# Altium PCB PCB1.pcbdoc (part 2 of 4)
Units mil, origin at the board's own origin, x right, y up, seen from the top; angles counter-clockwise.
Board outline 3346.69 x 4227.01 mil, 4 copper layers (Top Layer, Inner1, Inner2, Bottom Layer); 103 components, 145 nets, 660 pads, 276 vias.
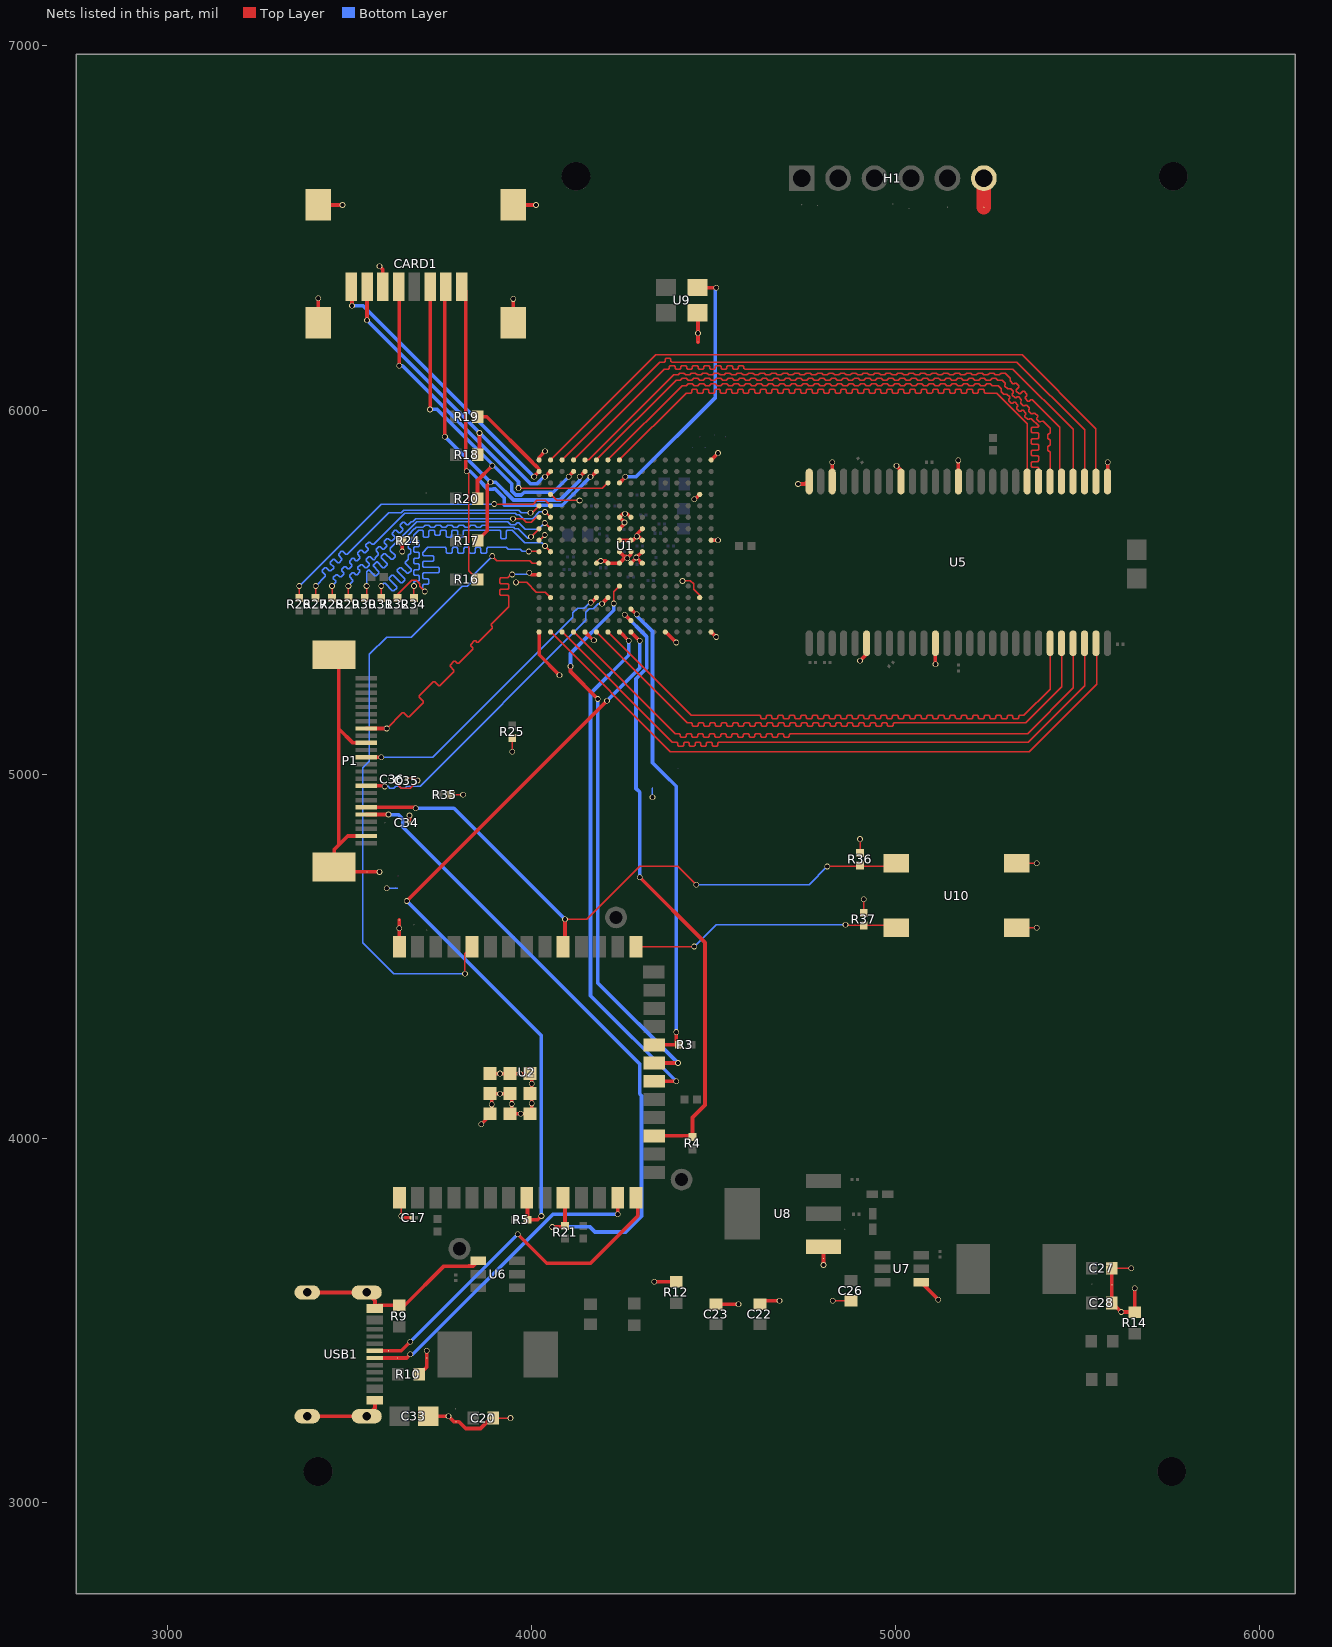
[diagram p4: the nets of this part, all layers, seen from the top]

## Via types
v1: diameter 15.75, hole 11.81, Top Layer to Bottom Layer, 260 vias
v2: diameter 24.02, hole 12.01, Top Layer to Bottom Layer, 16 vias

## Nets (pads, with @x,y where several pads share a name; then routed paths per layer and width w, separated by ;. In a path a pad name is that pad's centre, name@x,y a point inside that pad or via, vN(x,y) a via of type N, cw(c..) or ccw(c..) an arc to the next point about the centre after c; other vN are vias at no path point) (continued)
CRYSTAL: U1.C8 U9.3 | length 715.6
  Top Layer w10: U1.C8@4241.26,5800.24 4257.01,5815.99 v1(4257.01,5817.01) ; U9.3@4455.32,6336.46 v1(4507.01,6336.46)
  Bottom Layer w10: v1(4257.01,5817.01) 4287.01,5817.01 4504.92,6034.92 4504.92,6334.37 v1(4507.01,6336.46)
D0: R26.1 U1.E2 | length 827.3
  Top Layer w3.94: R26.1@3362.01,5484.05 v1(3362.01,5517.01) ; v1@3897.01,5742.01 4004.28,5742.01 4014.56,5752.29 4037.25,5752.29 U1.E2@4052.29,5737.25
  Bottom Layer w3.94: v1(3362.01,5517.01) 3587.01,5742.01 v1(3897.39,5742.01)
D1: R27.1 U1.E1 | length 830.3
  Top Layer w3.94: R27.1@3407.01,5484.05 v1(3407.01,5517.01) ; v1(3997.01,5718.15) 4001.69,5718.15 U1.E1@4020.79,5737.25
  Bottom Layer w3.94: v1(3407.01,5517.01) 3433.98,5543.98 3433.98,5547.91 3425.41,5556.48 3425.41,5560.41 3432.61,5567.61 3436.55,5567.61 3445.11,5559.05 3449.05,5559.05 3456.25,5566.25 3456.25,5570.19 3447.69,5578.75 3447.69,5582.69 3454.88,5589.88 3458.82,5589.88 3467.38,5581.32 3471.32,5581.32 3478.52,5588.52 3478.52,5592.46 3469.96,5601.02 3469.96,5604.96 3477.15,5612.15 3481.09,5612.15 3489.65,5603.59 3493.59,5603.59 3608.15,5718.15 3642.01,5718.15 3649.02,5725.16 3965.23,5725.16 3972.24,5718.15 v1(3997.01,5718.15)
D2: R28.1 U1.F2 | length 844.7
  Top Layer w3.94: R28.1@3452.01,5484.05 v1(3452.01,5517.01) ; v1(4036.89,5720.31) 4037.73,5720.31 U1.F2@4052.29,5705.75
  Bottom Layer w3.94: v1(3452.01,5517.01) 3462.01,5527.01 3462.01,5530.94 3455.94,5537.01 3455.94,5540.94 3463.14,5548.14 3467.08,5548.14 3473.14,5542.08 3477.08,5542.08 3484.28,5549.28 3484.28,5553.22 3478.22,5559.28 3478.22,5563.22 3485.41,5570.41 3489.35,5570.41 3495.41,5564.35 3499.35,5564.35 3506.55,5571.55 3506.55,5575.49 3500.49,5581.55 3500.49,5585.49 3507.69,5592.69 3511.62,5592.69 3517.69,5586.62 3521.62,5586.62 3528.82,5593.82 3528.82,5597.76 3522.76,5603.82 3522.76,5607.76 3529.96,5614.96 3533.89,5614.96 3539.96,5608.89 3543.89,5608.89 3551.09,5616.09 3551.09,5620.03 3545.03,5626.09 3545.03,5630.03 3552.23,5637.23 3556.16,5637.23 3562.23,5631.16 3566.16,5631.16 3652.28,5717.28 3955.33,5717.28 3959.64,5712.97 3966.28,5712.97 3976.93,5702.32 4003.56,5702.32 4021.55,5720.31 v1(4036.89,5720.31)
D3: R29.1 U1.F1 | length 814.7
  Top Layer w3.94: R29.1@3497.01,5484.05 v1(3497.01,5517.01) ; v1(3948.78,5701.46) 3976.32,5701.46 3985.45,5692.32 3998.56,5692.32 4012.66,5706.42 4020.12,5706.42 U1.F1@4020.79,5705.75
  Bottom Layer w3.94: v1(3497.01,5517.01) 3509.58,5529.58 3509.58,5533.52 3501.02,5542.08 3501.02,5546.02 3508.21,5553.21 3512.15,5553.21 3516.85,5548.52 3520.79,5548.52 3527.98,5555.72 3527.98,5559.65 3523.29,5564.35 3523.29,5568.29 3530.49,5575.49 3534.42,5575.49 3542.99,5566.92 3546.92,5566.92 3554.12,5574.12 3554.12,5578.06 3545.56,5586.62 3545.56,5590.56 3552.76,5597.76 3556.69,5597.76 3565.26,5589.19 3569.19,5589.19 3571.26,5591.26 3571.26,5595.05 3579.61,5603.41 3579.61,5607.34 3572.95,5614.01 3572.95,5617.95 3580.14,5625.14 3584.08,5625.14 3590.75,5618.48 3594.68,5618.48 3601.88,5625.68 3601.88,5629.61 3595.22,5636.28 3595.22,5640.22 3602.42,5647.42 3606.35,5647.42 3613.02,5640.75 3616.96,5640.75 3624.15,5647.95 3624.15,5651.88 3617.49,5658.55 3617.49,5662.49 3624.69,5669.69 3628.62,5669.69 3635.29,5663.02 3639.23,5663.02 3646.42,5670.22 3646.42,5674.16 3639.76,5680.82 3639.76,5684.76 3646.96,5691.96 3650.89,5691.96 3657.56,5685.29 3661.5,5685.29 3669.71,5693.5 3673.5,5693.5 3681.46,5701.46 v1(3948.78,5701.46)
D4: R30.1 U1.G2 | length 836.9
  Top Layer w3.94: R30.1@3542.01,5484.05 3547.01,5489.05 v1(3547.01,5517.01) ; v1(4036.29,5690.13) 4036.41,5690.13 U1.G2@4052.29,5674.25
  Bottom Layer w3.94: v1(3547.01,5517.01) 3547.01,5555.87 3552.76,5561.63 3553.47,5561.63 3569.69,5545.41 3573.63,5545.41 3580.83,5552.61 3580.83,5556.55 3564.61,5572.76 3564.61,5573.48 3575.04,5583.9 3575.75,5583.9 3591.96,5567.68 3595.9,5567.68 3603.1,5574.88 3603.1,5578.82 3586.88,5595.04 3586.88,5598.97 3594.08,5606.17 3598.02,5606.17 3614.23,5589.95 3618.17,5589.95 3625.37,5597.15 3625.37,5601.09 3612.01,5614.45 3612.01,5620.87 3628.77,5637.63 3632.7,5637.63 3641.3,5629.04 3645.23,5629.04 3652.43,5636.24 3652.43,5640.17 3643.84,5648.77 3643.84,5652.7 3684.72,5693.58 3934.27,5693.58 3942.22,5685.63 3955.33,5685.63 3960.33,5690.63 3964.6,5690.63 3982.39,5672.83 4019,5672.83 v1(4036.29,5690.13)
D5: R31.1 U1.G1 | length 826
  Top Layer w3.94: R31.1@3587.01,5484.05 v1(3587.01,5517.01) ; v1(3998.33,5652.01) 3998.55,5652.01 U1.G1@4020.79,5674.25
  Bottom Layer w3.94: v1(3587.01,5517.01) 3594.05,5524.05 3597.98,5524.05 3618.03,5504 3621.96,5504 3629.16,5511.2 3629.16,5515.14 3609.12,5535.18 3609.12,5539.12 3616.32,5546.32 3620.25,5546.32 3640.3,5526.28 3644.23,5526.28 3651.43,5533.47 3651.43,5537.41 3631.39,5557.45 3631.39,5561.39 3637.83,5567.83 3641.77,5567.83 3658,5551.6 3661.94,5551.6 3669.13,5558.8 3669.13,5562.74 3652.9,5578.97 3652.9,5582.9 3660.79,5590.79 3660.79,5600.93 3663.58,5603.72 3665.2,5603.72 3667.98,5606.5 3667.98,5616.68 3665.2,5619.47 3663.58,5619.47 3660.79,5622.25 3660.79,5632.43 3663.58,5635.21 3665.2,5635.21 3667.98,5638 3667.98,5648.18 3665.2,5650.96 3663.58,5650.96 3660.79,5653.75 3660.79,5656.64 3678.36,5674.21 3679.21,5674.21 3682.76,5677.76 3701.87,5677.76 3704.65,5680.54 3704.65,5681.77 3707.43,5684.56 3717.61,5684.56 3720.4,5681.77 3720.4,5680.54 3723.18,5677.76 3733.36,5677.76 3736.15,5680.54 3736.15,5681.77 3738.93,5684.56 3749.11,5684.56 3751.89,5681.77 3751.89,5680.54 3754.68,5677.76 3764.86,5677.76 3767.64,5680.54 3767.64,5681.77 3770.43,5684.56 3780.61,5684.56 3783.39,5681.77 3783.39,5680.54 3786.17,5677.76 3796.36,5677.76 3799.14,5680.54 3799.14,5681.77 3801.92,5684.56 3812.1,5684.56 3814.89,5681.77 3814.89,5680.54 3817.67,5677.76 3827.85,5677.76 3830.63,5680.54 3830.63,5681.77 3833.42,5684.56 3843.6,5684.56 3846.38,5681.77 3846.38,5680.54 3849.17,5677.76 3859.35,5677.76 3862.13,5680.54 3862.13,5681.77 3864.91,5684.56 3875.1,5684.56 3877.88,5681.77 3877.88,5680.54 3880.66,5677.76 3950.92,5677.76 3954.47,5674.21 3963.47,5674.21 3989.22,5648.46 3994.78,5648.46 v1(3998.33,5652.01)
D6: R32.1 U1.J1 | length 823.8
  Top Layer w3.94: R32.1@3632.01,5484.05 3632.01,5494.39 3670.45,5532.83 3683.56,5532.83 3692.83,5523.56 3692.83,5516.18 v1(3707.01,5502.01) ; v1(3992.01,5612.01) 4020.04,5612.01 U1.J1@4020.79,5611.26
  Bottom Layer w3.94: v1(3707.01,5502.01) 3701.18,5507.83 3701.18,5519.02 3703.97,5521.8 3714.37,5521.8 3717.15,5524.58 3717.15,5534.76 3714.37,5537.55 3703.97,5537.55 3701.18,5540.33 3701.18,5550.51 3703.97,5553.3 3744.22,5553.3 3747.01,5556.08 3747.01,5566.26 3744.22,5569.04 3703.97,5569.04 3701.18,5571.83 3701.18,5582.01 3703.97,5584.79 3729.21,5584.79 3732,5587.58 3732,5597.76 3729.21,5600.54 3703.97,5600.54 3701.18,5603.32 3701.18,5608.56 3715.45,5622.83 3763.38,5622.83 3766.17,5620.05 3766.17,5609.79 3768.95,5607.01 3779.13,5607.01 3781.92,5609.79 3781.92,5620.05 3784.7,5622.83 3794.88,5622.83 3797.66,5620.05 3797.66,5609.79 3800.45,5607.01 3810.63,5607.01 3813.41,5609.79 3813.41,5620.05 3816.2,5622.83 3826.38,5622.83 3829.16,5620.05 3829.16,5609.79 3831.94,5607.01 3842.12,5607.01 3844.91,5609.79 3844.91,5620.05 3847.69,5622.83 3857.87,5622.83 3860.66,5620.05 3860.66,5609.79 3863.44,5607.01 3873.62,5607.01 3876.4,5609.79 3876.4,5620.05 3879.19,5622.83 3931.18,5622.83 3936.18,5617.83 3968.56,5617.83 3974.39,5612.01 v1(3992.01,5612.01)
D7: R34.1 U1.J2 | length 826.3
  Top Layer w3.94: R34.1@3677.01,5484.05 v1(3677.01,5517.01) ; v1(4037.01,5627.01) 4037.01,5626.54 U1.J2@4052.29,5611.26
  Bottom Layer w3.94: v1(3677.01,5517.01) 3677.01,5527.8 3679.79,5530.59 3689.37,5530.59 3692.15,5533.37 3692.15,5543.55 3689.37,5546.34 3679.79,5546.34 3677.01,5549.12 3677.01,5559.3 3679.79,5562.08 3689.37,5562.08 3692.15,5564.87 3692.15,5575.05 3689.37,5577.83 3679.79,5577.83 3677.01,5580.62 3677.01,5590.8 3679.79,5593.58 3689.37,5593.58 3692.15,5596.36 3692.15,5606.54 3689.37,5609.33 3679.79,5609.33 3677.01,5612.11 3677.01,5622.29 3679.79,5625.08 3689.37,5625.08 3692.15,5627.86 3692.15,5638.04 3689.37,5640.82 3679.79,5640.82 3677.01,5643.61 3677.01,5657.01 3689.88,5669.88 3699.67,5669.88 3702.45,5667.1 3702.45,5653.78 3705.24,5651 3715.42,5651 3718.2,5653.78 3718.2,5667.1 3720.99,5669.88 3731.17,5669.88 3733.95,5667.1 3733.95,5659.35 3736.73,5656.56 3746.91,5656.56 3749.7,5659.35 3749.7,5667.1 3752.48,5669.88 3762.66,5669.88 3765.45,5667.1 3765.45,5653.78 3768.23,5651 3778.41,5651 3781.19,5653.78 3781.19,5667.1 3783.98,5669.88 3794.16,5669.88 3796.94,5667.1 3796.94,5653.78 3799.73,5651 3809.91,5651 3812.69,5653.78 3812.69,5667.1 3815.47,5669.88 3912.07,5669.88 3914.85,5667.1 3914.85,5649.79 3917.64,5647.01 3927.82,5647.01 3930.6,5649.79 3930.6,5667.1 3933.39,5669.88 3947.66,5669.88 3981.36,5636.18 4027.83,5636.18 v1(4037.01,5627.01)
DIN: U1.T8 U2.20 | length 1441.2
  Top Layer w10: U1.T8@4241.26,5390.79 4243.23,5390.79 v1(4267.01,5367.01) ; U2.20@4342.2,4157.01 v1(4397.01,4157.01)
  Bottom Layer w10: v1(4267.01,5367.01) 4267.01,5327.01 4162.01,5222.01 4162.01,4392.01 v1(4397.01,4157.01)
DN: pad.55@3632.01,3397.01 U2.13 USB1.A7 | length 878
  Top Layer w10: USB1.A7@3570.02,3397.17 3621.05,3397.17 3657.17,3397.17 v1(3667.01,3407.01) ; v1(4237.01,3792.01) 4237.01,3832.71 U2.13@4241.81,3837.52
  Bottom Layer w10: v1(3667.01,3407.01) 3673.68,3407.01 4058.68,3792.01 v1(4237.01,3792.01)
DONE: pad.55@4364.77,4999.24 R3.2 U1.P9 U2.22 | length 1315.4
  Top Layer w10: U1.P9@4272.76,5453.78 4287.33,5439.2 v1(4289.2,5439.2) ; U2.22@4342.2,4257.01 R3.2@4404.97,4257.01 4397.01,4264.97 v1(4397.01,4292.01)
  Bottom Layer w10: v1(4289.2,5439.2) 4289.2,5434.81 4332.01,5392.01 4332.01,5032.01 pad.55@4364.77,4999.24 4397.01,4967.01 v1(4397.01,4292.01)
DOUT: U1.M8 U2.21 | length 1547.4
  Top Layer w3.94: v1(4225.51,5468.95) 4225.51,5501.02 U1.M8@4241.26,5516.77
  Top Layer w10: v1(4107.01,5297.01) 4107.01,5282.01 v1(4182.01,5207.01) ; U2.21@4342.2,4207.01 v1(4402.01,4207.01)
  Bottom Layer w10: v1(4107.01,5297.01) 4107.01,5332.01 4225.51,5450.51 v1(4225.51,5468.95) ; v1(4182.01,5207.01) 4182.01,4427.01 v1(4402.01,4207.01)
DP: pad.55@3607.01,3417.01 U2.14 USB1.A6 | length 992
  Top Layer w10: USB1.A6@3570.02,3416.85 3619.28,3416.85 3641.85,3416.85 v1(3667.01,3442.01) ; v1(3962.01,3737.01) 4042.01,3657.01 4162.01,3657.01 4291.81,3786.81 U2.14@4291.81,3837.52
  Bottom Layer w10: v1(3667.01,3442.01) v1(3962.01,3737.01)
GND: C17.1 C20.1 C22.1 C23.1 C26.1 C27.1 C28.1 C33.1 C34.2 C35.2 C36.2 CARD1.6 CARD1.9 CARD1.10 CARD1.11 CARD1.12 H1.6 P1.2 P1.15 P1.25 P1.26 pad.55@3548.45,4732.01 pad.55@3627.01,4687.01 pad.55@3636.81,4599.69 pad.55@3712.01,3397.01 pad.55@3792.01,3222.01 pad.55@4332.01,4962.01 pad.55@4457.01,6187.01 pad.55@4801.76,3670.62 pad.55@5242.01,6557.01 pad.55@5593.75,3598.16 R9.1 R10.1 R12.1 R14.1 R24.1 R25.1 R35.2 R36.2 R37.2 U1.A1 U1.A16 U1.D2 U1.D15 U1.F8 U1.F9 U1.G8 U1.G10 U1.H1 U1.H8 U1.H9 U1.H10 U1.H16 U1.J8 U1.J9 U1.J10 U1.K6 U1.K7 U1.K8 U1.K9 U1.K10 U1.N2 U1.N15 U1.T1 U1.T5 U1.T12 U1.T16 U2.1 U2.40 U2.41 U5.6 U5.12 U5.28 U5.41 U5.46 U5.52 U5.54 U6.4 U7.4 U8.1 U9.2 U10.2 U10.4 USB1.1 USB1.2 USB1.3 USB1.4 USB1.A1B12 USB1.B1A12 | length 5600.2
  Top Layer w3.94: C36.2@3624.69,4987.01 3624.69,4979.33 3641.77,4962.24 3667.24,4962.24 3687.01,4982.01 v1(3687.01,4982.83) 3680.15,4989.69 C35.2@3657.01,4989.69 ; U2.1@3636.81,3837.52 3641.81,3832.52 v1(3641.81,3787.01) ; R35.2@3778.5,4943.95 v1(3812.01,4943.95) ; C20.1@3894.57,3232.01 v1(3942.01,3232.01) ; v1(3947.01,5062.01) R25.1@3947.01,5099.97 ; v1(3957.01,5527.01) 3987.01,5527.01 4013.46,5500.56 4037.01,5500.56 U1.N2@4052.29,5485.28 ; 4027.01,5647.01 4036.53,5656.53 v1(4036.53,5657.01) ; U1.D2@4052.29,5768.74 4069.02,5752.01 4077.27,5752.01 4077.55,5752.29 4121.51,5752.29 4121.79,5752.01 v1@4132.01,5752.01 ; v1(4414.49,5530.64) 4419.96,5530.64 4421.13,5531.81 4436.47,5531.81 4445.28,5523 4445.28,5507.66 4461.73,5491.21 U1.N15@4461.73,5485.28 ; v1(4827.01,3554.45) C26.1@4877.01,3554.45 ; R36.2@4902.01,4784.05 v1(4902.01,4822.01) ; R37.2@4912.01,4619.05 v1(4912.01,4657.01) ; U10.4@5332.36,4578.42 v1(5387.01,4578.42) ; U10.2@5332.36,4755.59 v1(5387.01,4755.59) ; C27.1@5593.75,3643.55 v1(5647.01,3643.55)
  Top Layer w10: USB1.4@3384,3236.93 USB1.2@3547.38,3236.93 3570.02,3259.57 USB1.B1A12@3570.02,3281.03 ; USB1.3@3384,3577.09 USB1.1@3547.38,3577.09 3570.02,3554.45 USB1.A1B12@3570.02,3533 3578.69,3541.67 R9.1@3637.01,3541.67 3652.01,3541.67 3759.75,3649.41 3827.26,3649.41 3827.65,3649.8 3839.25,3649.8 U6.4@3853.86,3664.41 ; CARD1.10@3414.29,6240.59 v1(3414.28,6307.18) ; CARD1.9@3414.29,6563.43 v1(3480.63,6563.43) ; P1.25@3457.45,5328.38 3470.61,5315.23 3470.61,5125.37 ; P1.2@3546.45,4830.49 3495.49,4830.49 3470.61,4805.61 ; P1.15@3546.5,5086.24 3509.73,5086.24 3470.61,5125.37 ; v1(3582.5,6395.22) 3591.45,6386.27 CARD1.6@3591.45,6339.02 ; v1(3582.7,4732.01) pad.55@3548.45,4732.01 3471.32,4732.01 P1.26@3457.7,4745.63 3457.7,4792.7 3470.61,4805.61 ; pad.55@3636.81,4599.69 v1(3636.81,4577.16) 3636.81,4531.5 U2.40@3641.81,4526.5 ; v1(3641.81,3787.01) 3646.81,3782.01 C17.1@3669.33,3782.01 ; v1(3644.97,5611.75) R24.1@3644.97,5642.01 ; C34.2@3664.69,4867.01 v1(3664.69,4887.01) ; R10.1@3691.67,3352.01 3712.01,3372.35 pad.55@3712.01,3397.01 v1(3712.01,3417.01) ; C33.1@3716.38,3237.01 v1(3772.01,3237.01) 3787.01,3222.01 3800.45,3222.01 3819.15,3203.31 3859.75,3203.31 3888.45,3232.01 C20.1@3894.57,3232.01 ; v1(3862.04,4039.24) 3890.63,4067.83 v1(3890.63,4093.53) 3890.63,4122.95 v1(3913.31,4122.95) 3945.75,4122.95 v1(3945.75,4094.52) 3945.75,4067.83 v1(3970.16,4067.83) 4000.87,4067.83 v1(4000.87,4096.24) v1(4000.87,4149.89) 4000.87,4178.07 v1(3967.45,4178.07) v1(3913.31,4178.07) U2.41@3890.63,4178.07 ; CARD1.11@3949.72,6240.59 v1(3949.72,6305.52) ; CARD1.12@3949.72,6563.43 v1(4012.01,6563.43) ; U1.T1@4020.79,5390.79 4020.79,5328.23 v1(4077.01,5272.01) ; U1.A1@4020.79,5863.23 4020.79,5870.79 v1(4037.01,5887.01) ; U1.T5@4146.77,5390.79 4169.71,5367.84 v1(4171.17,5367.84) ; U1.K6@4178.27,5579.77 4184.35,5585.85 v1(4190.02,5585.85) 4203.69,5585.85 U1.K7@4209.77,5579.77 U1.K8@4241.26,5579.77 v1@4259.45,5597.96 ; U1.J8@4241.26,5611.26 4254.56,5597.96 v1@4259.45,5597.96 ; U1.H8@4241.26,5642.76 U1.H9@4272.76,5642.76 4278.68,5642.76 v1(4289.25,5653.32) ; U1.G8@4241.26,5674.25 4255.12,5688.11 v1(4255.12,5691.24) 4255.12,5691.88 U1.F8@4241.26,5705.75 4251.26,5715.75 v1(4256.64,5715.75) 4262.76,5715.75 U1.F9@4272.76,5705.75 ; U1.K9@4272.76,5579.77 4287.66,5594.67 v1(4287.66,5595.2) ; U1.J9@4272.76,5611.26 4272.76,5603.5 v1(4262.54,5593.29) 4262.54,5594.86 v1@4259.45,5597.96 ; U1.K10@4298.12,5580.87 4298.12,5584.74 v1(4287.66,5595.2) ; U1.J10@4304.25,5611.26 4303.73,5611.26 v1(4287.66,5595.2) ; U1.H10@4304.25,5642.76 4293.68,5653.32 v1(4289.25,5653.32) ; U1.G10@4304.25,5674.25 4289.25,5659.25 v1(4289.25,5653.32) ; v1(4337.01,3606.67) R12.1@4397.01,3606.67 ; U1.T12@4367.25,5390.79 4368.23,5390.79 v1(4397.05,5361.97) ; v1@4447.01,5757.01 4450,5757.01 U1.D15@4461.73,5768.74 ; U9.2@4455.32,6267.56 4457.01,6265.87 v1(4457.01,6210.84) pad.55@4457.01,6187.01 ; U1.T16@4493.23,5390.79 v1(4507.01,5377.01) ; U1.H16@4493.23,5642.76 v1(4512.01,5642.83) ; U1.A16@4493.23,5863.23 v1(4512.01,5882.01) ; C23.1@4507.01,3544.57 v1(4568.19,3544.57) ; C22.1@4627.01,3544.57 4636.89,3554.45 v1(4680.98,3554.45) ; v1(4732.01,5797.01) 4750.43,5797.01 U5.54@4762.56,5809.14 ; v1(4801.76,3652.39) pad.55@4801.76,3670.62 U8.1@4801.76,3702.6 ; U5.52@4825.55,5809.14 v1(4825.55,5857.01) ; v1(4902.01,5312.01) 4920.04,5330.04 U5.6@4920.04,5359.88 ; v1(5002.01,5847.01) 5014.53,5834.49 U5.46@5014.53,5804.14 ; U7.4@5070.16,3604.61 5117.01,3557.76 v1(5117.01,3557.01) ; v1(5109.02,5302.01) U5.12@5109.02,5359.88 ; U5.41@5172.01,5809.14 v1(5172.01,5862.01) ; U5.28@5581.46,5804.14 5582.01,5804.69 v1(5582.01,5857.01) ; C27.1@5593.75,3643.55 pad.55@5593.75,3598.16 C28.1@5593.75,3548.55 v1(5619.09,3523.21) R14.1@5656.19,3523.21 v1(5656.19,3588.55) ; 3470.61,4805.61 3470.61,5125.37
  Top Layer w39.37: pad.55@5242.01,6557.01 H1.6@5242.01,6637.01
  Bottom Layer w3.94: v1(3602.01,4687.01) 3632.01,4687.01 ; v1(4332.01,4937.01) pad.55@4332.01,4962.01
  other v1: 4131.96,5752.06 4447.01,5755.14
HREF: P1.9 U1.N7 | length 902.4
  Top Layer w10: P1.9@3546.45,4968.28 3595.38,4968.28 v1(3597.04,4966.63) ; v1@4192.01,5467.01 4192.01,5467.52 U1.N7@4209.77,5485.28
  Bottom Layer w3.94: v1(3597.04,4966.63) 3606.07,4966.63 3610.69,4962.01 3621.44,4962.01 3626.44,4967.01 3637.19,4967.01 3642.19,4962.01 3652.94,4962.01 3657.94,4967.01 3693.93,4967.01 4149.36,5422.44 4149.36,5445.38 4158.63,5454.65 4169.65,5454.65 4183.33,5468.33 v1(4193.33,5468.33)
INITN: pad.55@3687.91,4621.1 R5.1 U1.T9 U2.8 | length 2136.2
  Top Layer w10: v1(3657.01,4652.01) v1(4207.01,5202.01) ; U2.8@3991.81,3837.52 3989.05,3834.75 R5.1@3989.05,3777.01 4017.01,3777.01 v1(4027.01,3787.01) ; U1.T9@4272.76,5390.79 4296.54,5367.01 v1(4297.01,5367.01)
  Bottom Layer w10: v1(3657.01,4652.01) pad.55@3687.91,4621.1 4027.01,4282.01 v1(4027.01,3787.01) ; v1(4207.01,5202.01) 4297.01,5292.01 v1(4297.01,5367.01)
M_CLK: CARD1.5 U1.C7 | length 946.6
  Top Layer w3.94: v1(3964.16,5785.9) 3964.86,5785.2 4194.73,5785.2 U1.C7@4209.77,5800.24
  Top Layer w10: CARD1.5@3634.76,6339.02 3637.01,6336.77 v1(3637.01,6122.01)
  Bottom Layer w10: v1(3637.01,6122.01) 3645.34,6122.01 3964.16,5803.18 v1(3964.16,5785.9)
M_CMD: CARD1.3 R20.1 U1.B4 | length 974.3
  Top Layer w10: v1(3721.38,6002.01) CARD1.3@3721.38,6339.02 ; R20.1@3851.67,5757.01 3851.67,5806.67 v1(3892.01,5847.01) ; v1(4102.01,5817.01) 4102.01,5818.46 U1.B4@4115.28,5831.73
  Bottom Layer w10: v1(3721.38,6002.01) 3741.38,6002.01 3945.31,5798.09 3945.31,5778.09 3956.35,5767.04 3971.98,5767.04 3979.82,5774.88 4059.88,5774.88 v1(4102.01,5817.01)
M_D0: CARD1.7 R18.1 U1.B2 | length 858.2
  Top Layer w10: v1(3548.15,6247.01) CARD1.7@3548.15,6339.02 ; R18.1@3851.67,5877.01 3857.01,5882.35 v1(3857.01,5937.01) ; v1(4037.01,5817.01) 4037.57,5817.01 U1.B2@4052.29,5831.73
  Bottom Layer w10: v1(3548.15,6247.01) 3997.01,5798.15 4014.82,5798.15 4033.68,5817.01 v1(4037.01,5817.01)
M_D1: CARD1.8 R19.1 U1.B1 | length 1003.9
  Top Layer w10: CARD1.8@3504.84,6339.02 3507.01,6336.85 v1(3507.01,6287.01) ; R19.1@3851.67,5982.01 3876.67,5982.01 4002.72,5855.96 4002.72,5855.74 4013.3,5845.16 4013.52,5845.16 4019.51,5839.17 U1.B1@4019.51,5830.45 ; v1(4007.01,5817.01) 4007.01,5817.95 U1.B1@4019.51,5830.45 ; U1.B1@4020.79,5831.73 U1.B1@4019.51,5830.45
  Bottom Layer w10: v1(3507.01,6287.01) 3537.01,6287.01 v1(4007.01,5817.01)
M_D2: CARD1.1 R16.1 U1.B6 | length 1267.9
  Top Layer w3.94: v1(3822.01,5832.01) 3827.84,5826.18 3827.84,5558.65 R16.1@3851.51,5534.98
  Top Layer w10: CARD1.1@3807.99,6339.02 3819.21,6327.8 3819.21,5834.81 v1(3822.01,5832.01) ; v1(4162.01,5817.01) 4163.55,5817.01 U1.B6@4178.27,5831.73
  Bottom Layer w10: v1(3822.01,5832.01) 3832.01,5832.01 3868.15,5795.87 3868.15,5794.2 3879.2,5783.15 3894.82,5783.15 3895.36,5783.69 3900.28,5783.69 3925.34,5758.63 3925.34,5739.16 4084.16,5739.16 v1(4162.01,5817.01)
M_D3: CARD1.2 R17.1 U1.B5 | length 1083.1
  Top Layer w10: v1(3762.01,5927.01) 3762.01,6336.34 CARD1.2@3764.68,6339.02 ; R17.1@3851.67,5642.01 3878.53,5668.87 3878.53,5793.53 v1(3887.01,5802.01) ; v1(4132.01,5817.01) U1.B5@4146.77,5831.73
  Bottom Layer w10: v1(3762.01,5927.01) v1(3887.01,5802.01) 3901.67,5802.01 3950.58,5753.1 4078.39,5753.1 4132.01,5806.72 v1(4132.01,5817.01)
MCLK: P1.13 U1.N6 | length 820.7
  Top Layer w10: P1.13@3546.45,5047.02 v1(3587.01,5047.02) ; v1@4162.01,5472.01 4165,5472.01 U1.N6@4178.27,5485.28
  Bottom Layer w3.94: v1(3587.01,5047.02) 3729.03,5047.02 4113.48,5431.48 4113.48,5443.48 4126.17,5456.17 4144.73,5456.17 4160.01,5471.45 v1(4162.56,5471.45)
PCLK: P1.17 U1.L1 | length 890.4
  Top Layer w3.94: v1(3602.01,5125.75) 3645.14,5168.88 3649.07,5168.88 3659.7,5158.25 3663.64,5158.25 3702.13,5196.74 3702.13,5200.68 3691.5,5211.31 3691.5,5215.24 3729.99,5253.73 3733.93,5253.73 3744.55,5243.11 3748.49,5243.11 3786.98,5281.59 3786.98,5285.53 3776.35,5296.16 3776.35,5300.1 3786.24,5309.98 3790.18,5309.98 3795.61,5304.55 3799.55,5304.55 3838.04,5343.04 3838.04,5346.97 3832.6,5352.41 3832.6,5356.35 3842.56,5366.3 3846.49,5366.3 3849.63,5363.17 3853.57,5363.17 3892.05,5401.66 3892.05,5405.59 3888.92,5408.73 3888.92,5412.67 3937.01,5460.75 3937.01,5489.04 3934.22,5491.82 3914.99,5491.82 3912.21,5494.61 3912.21,5504.79 3914.99,5507.57 3934.22,5507.57 3937.01,5510.35 3937.01,5520.53 3934.22,5523.32 3914.99,5523.32 3912.21,5526.1 3912.21,5536.28 3914.99,5539.07 3934.22,5539.07 3943.9,5548.74 v1(3947.01,5548.74)
  Top Layer w10: P1.17@3546.43,5125.75 v1(3602.01,5125.75) ; v1(3993.77,5553.77) 3999.27,5548.27 U1.L1@4020.79,5548.27
  Bottom Layer w3.94: v1(3947.01,5548.74) 3988.74,5548.74 v1(3993.77,5553.77)
PROGRAM: R37.1 U2.27 U10.3 | length 743.5
  Top Layer w3.94: U2.27@4286.81,4526.5 4446.5,4526.5 v1(4447.01,4527.01) ; v1(4862.01,4587.01) 4864.05,4584.97 R37.1@4912.01,4584.97 4995.11,4584.97 U10.3@5001.66,4578.42
  Bottom Layer w3.94: v1(4447.01,4527.01) 4507.01,4587.01 v1(4862.01,4587.01)
PROGRAMN: pad.55@4287.01,4961.17 R4.2 U1.R9 U2.17 | length 1688.8
  Top Layer w10: v1(4255.56,5438.46) 4256.59,5438.46 U1.R9@4272.76,5422.29 ; v1(4297.01,4717.01) 4476.17,4537.85 4476.17,4091.83 4442.01,4057.67 R4.2@4442.01,4004.05 4439.05,4007.01 U2.17@4342.2,4007.01
  Bottom Layer w10: v1(4255.56,5438.46) 4315.87,5378.15 4315.87,5291.16 4287.01,5262.3 pad.55@4287.01,4961.17 4297.01,4951.17 v1(4297.01,4717.01)
RESET: P1.6 pad.55@3927.13,4766.69 R36.1 U2.31 U10.1 | length 1763
  Top Layer w3.94: v1(4091.81,4602.01) 4152.01,4602.01 4297.01,4747.01 4402.01,4747.01 v1(4452.01,4697.01) ; v1(4812.01,4747.01) 4993.07,4747.01 U10.1@5001.66,4755.59
  Top Layer w10: P1.6@3546.45,4909.23 3679.78,4909.23 v1(3682.01,4907.01) ; U2.31@4091.81,4526.5 v1(4091.81,4602.01)
  Bottom Layer w3.94: v1(4452.01,4697.01) 4762.01,4697.01 v1(4812.01,4747.01)
  Bottom Layer w10: v1(3682.01,4907.01) 3786.81,4907.01 pad.55@3927.13,4766.69 v1(4091.81,4602.01)
RX: U1.K1 U2.36 | length 1792.2
  Top Layer w3.94: v1(3817.01,4452.01) 3817.01,4506.69 U2.36@3836.81,4526.5 ; v1(3892.06,5599.18) 3904.96,5586.27 3995.46,5586.27 4001.97,5579.77 U1.K1@4020.79,5579.77
  Bottom Layer w3.94: v1(3817.01,4452.01) 3622.01,4452.01 3537.01,4537.01 3537.01,5018.42 3554.32,5035.74 3554.32,5329.32 3602.01,5377.01 3669.89,5377.01 3809.06,5516.18 3823.56,5516.18 3832.83,5525.45 3832.83,5539.95 v1(3892.06,5599.18)
SCL: P1.5 R21.1 U2.10 | length 1847.1
  Top Layer w10: P1.5@3546.45,4889.54 v1(3607.01,4889.54) ; v1(4057.01,3757.01) 4089.97,3757.01 R21.1@4092.01,3759.05 ; U2.10@4091.81,3837.52 4092.01,3837.32 R21.1@4092.01,3762.01
  Bottom Layer w10: v1(3607.01,4889.54) 3612.01,4889.54 3612.83,4888.72 3634.82,4888.72 3645.87,4877.67 3645.87,4855.68 4297.01,4204.54 4297.01,4122.3 4302.01,4117.3 4302.01,3787.01 4258.15,3743.15 4174.2,3743.15 4160.34,3757.01 v1(4057.01,3757.01)
SD_A0: U1.T6 U5.23 | length 1783
  Top Layer w3.94: U1.T6@4178.27,5390.79 4427.05,5142.01 4438.86,5142.01 4441.64,5139.22 4441.64,5134.79 4444.43,5132.01 4454.61,5132.01 4457.39,5134.79 4457.39,5139.22 4460.17,5142.01 4470.35,5142.01 4473.14,5139.22 4473.14,5134.79 4475.92,5132.01 4486.1,5132.01 4488.89,5134.79 4488.89,5139.22 4491.67,5142.01 4501.85,5142.01 4504.63,5139.22 4504.63,5134.79 4507.42,5132.01 4517.6,5132.01 4520.38,5134.79 4520.38,5139.22 4523.17,5142.01 4533.35,5142.01 4536.13,5139.22 4536.13,5134.79 4538.91,5132.01 4549.1,5132.01 4551.88,5134.79 4551.88,5139.22 4554.66,5142.01 4564.84,5142.01 4567.63,5139.22 4567.63,5134.79 4570.41,5132.01 4580.59,5132.01 4583.38,5134.79 4583.38,5139.22 4586.16,5142.01 4596.34,5142.01 4599.12,5139.22 4599.12,5134.79 4601.91,5132.01 4612.09,5132.01 4614.87,5134.79 4614.87,5139.22 4617.65,5142.01 4627.84,5142.01 4630.62,5139.22 4630.62,5134.79 4633.4,5132.01 4643.58,5132.01 4646.37,5134.79 4646.37,5139.22 4649.15,5142.01 4659.33,5142.01 4662.12,5139.22 4662.12,5134.79 4664.9,5132.01 4675.08,5132.01 4677.86,5134.79 4677.86,5139.22 4680.65,5142.01 4690.83,5142.01 4693.61,5139.22 4693.61,5134.79 4696.4,5132.01 4706.58,5132.01 4709.36,5134.79 4709.36,5139.22 4712.14,5142.01 4722.32,5142.01 4725.11,5139.22 4725.11,5134.79 4727.89,5132.01 4738.07,5132.01 4740.86,5134.79 4740.86,5139.22 4743.64,5142.01 4753.82,5142.01 4756.6,5139.22 4756.6,5134.79 4759.39,5132.01 4769.57,5132.01 4772.35,5134.79 4772.35,5139.22 4775.14,5142.01 4785.32,5142.01 4788.1,5139.22 4788.1,5134.79 4790.88,5132.01 4801.06,5132.01 4803.85,5134.79 4803.85,5139.22 4806.63,5142.01 4816.81,5142.01 4819.6,5139.22 4819.6,5134.79 4822.38,5132.01 4832.56,5132.01 4835.34,5134.79 4835.34,5139.22 4838.13,5142.01 4848.31,5142.01 4851.09,5139.22 4851.09,5134.79 4853.88,5132.01 4864.06,5132.01 4866.84,5134.79 4866.84,5139.22 4869.62,5142.01 4879.8,5142.01 4882.59,5139.22 4882.59,5134.79 4885.37,5132.01 4895.55,5132.01 4898.34,5134.79 4898.34,5139.22 4901.12,5142.01 4911.3,5142.01 4914.08,5139.22 4914.08,5134.79 4916.87,5132.01 4927.05,5132.01 4929.83,5134.79 4929.83,5139.22 4932.62,5142.01 4942.8,5142.01 4945.58,5139.22 4945.58,5134.79 4948.36,5132.01 4958.54,5132.01 4961.33,5134.79 4961.33,5139.22 4964.11,5142.01 4974.29,5142.01 4977.08,5139.22 4977.08,5134.79 4979.86,5132.01 4990.04,5132.01 4992.82,5134.79 4992.82,5139.22 4995.61,5142.01 5357.01,5142.01 5455.48,5240.48 U5.23@5455.48,5359.88
SD_A1: U1.T4 U5.24 | length 1796.6
  Top Layer w3.94: U1.T4@4115.28,5390.79 4394.06,5112.01 4405.87,5112.01 4408.65,5109.22 4408.65,5104.79 4411.44,5102.01 4421.62,5102.01 4424.4,5104.79 4424.4,5109.22 4427.18,5112.01 4437.36,5112.01 4440.15,5109.22 4440.15,5104.79 4442.93,5102.01 4453.11,5102.01 4455.9,5104.79 4455.9,5109.22 4458.68,5112.01 4468.86,5112.01 4471.64,5109.22 4471.64,5104.79 4474.43,5102.01 4484.61,5102.01 4487.39,5104.79 4487.39,5109.22 4490.18,5112.01 4500.36,5112.01 4503.14,5109.22 4503.14,5104.79 4505.92,5102.01 4516.11,5102.01 4518.89,5104.79 4518.89,5109.22 4521.67,5112.01 4531.85,5112.01 4534.64,5109.22 4534.64,5104.79 4537.42,5102.01 4547.6,5102.01 4550.39,5104.79 4550.39,5109.22 4553.17,5112.01 4563.35,5112.01 4566.13,5109.22 4566.13,5104.79 4568.92,5102.01 4579.1,5102.01 4581.88,5104.79 4581.88,5109.22 4584.66,5112.01 4594.85,5112.01 4597.63,5109.22 4597.63,5104.79 4600.41,5102.01 4610.59,5102.01 4613.38,5104.79 4613.38,5109.22 4616.16,5112.01 4626.34,5112.01 4629.13,5109.22 4629.13,5104.79 4631.91,5102.01 4642.09,5102.01 4644.87,5104.79 4644.87,5109.22 4647.66,5112.01 4657.84,5112.01 4660.62,5109.22 4660.62,5104.79 4663.41,5102.01 4673.59,5102.01 4676.37,5104.79 4676.37,5109.22 4679.15,5112.01 4689.33,5112.01 4692.12,5109.22 4692.12,5104.79 4694.9,5102.01 4705.08,5102.01 4707.87,5104.79 4707.87,5109.22 4710.65,5112.01 5362.01,5112.01 5487.01,5237.01 U5.24@5487.01,5359.84
SD_A2: U1.T3 U5.25 | length 1806.1
  Top Layer w3.94: U1.T3@4083.78,5390.79 4386.1,5088.47 4398.82,5088.47 4401.6,5085.68 4401.6,5079.79 4404.39,5077.01 4414.57,5077.01 4417.35,5079.79 4417.35,5085.68 4420.13,5088.47 4430.31,5088.47 4433.1,5085.68 4433.1,5079.79 4435.88,5077.01 4446.06,5077.01 4448.85,5079.79 4448.85,5085.68 4451.63,5088.47 4461.81,5088.47 4464.59,5085.68 4464.59,5079.79 4467.38,5077.01 4477.56,5077.01 4480.34,5079.79 4480.34,5085.68 4483.13,5088.47 4493.31,5088.47 4496.09,5085.68 4496.09,5079.79 4498.87,5077.01 4509.06,5077.01 4511.84,5079.79 4511.84,5085.68 4514.62,5088.47 5363.47,5088.47 5518.47,5243.47 U5.25@5518.47,5359.88
SD_A3: U1.T2 U5.26 | length 1826.3
  Top Layer w3.94: U1.T2@4052.29,5390.79 4381.07,5062.01 5367.01,5062.01 5552.01,5247.01 5552.01,5357.83 U5.26@5549.96,5359.88
SD_A4: U1.A2 U5.29 | length 1846.3
  Top Layer w3.94: U1.A2@4052.29,5863.23 4341.07,6152.01 5347.01,6152.01 5549.96,5949.06 U5.29@5549.96,5804.14
SD_A5: U1.A3 U5.30 | length 1778.1
  Top Layer w3.94: U1.A3@4083.78,5863.23 4352.56,6132.01 4364.37,6132.01 4367.15,6134.79 4367.15,6139.22 4369.94,6142.01 4380.12,6142.01 4382.9,6139.22 4382.9,6134.79 4385.68,6132.01 5332.01,6132.01 5518.47,5945.55 U5.30@5518.47,5804.14
SD_A6: U1.A4 U5.31 | length 1780.3
  Top Layer w3.94: U1.A4@4115.28,5863.23 4364.06,6112.01 4375.87,6112.01 4378.65,6114.79 4378.65,6119.22 4381.44,6122.01 4391.62,6122.01 4394.4,6119.22 4394.4,6114.79 4397.18,6112.01 4407.36,6112.01 4410.15,6114.79 4410.15,6119.22 4412.93,6122.01 4423.11,6122.01 4425.9,6119.22 4425.9,6114.79 4428.68,6112.01 4438.86,6112.01 4441.64,6114.79 4441.64,6119.22 4444.43,6122.01 4454.61,6122.01 4457.39,6119.22 4457.39,6114.79 4460.18,6112.01 4470.36,6112.01 4473.14,6114.79 4473.14,6119.22 4475.92,6122.01 4486.11,6122.01 4488.89,6119.22 4488.89,6114.79 4491.67,6112.01 4501.85,6112.01 4504.64,6114.79 4504.64,6119.22 4507.42,6122.01 4517.6,6122.01 4520.39,6119.22 4520.39,6114.79 4523.17,6112.01 4533.35,6112.01 4536.13,6114.79 4536.13,6119.22 4538.92,6122.01 4549.1,6122.01 4551.88,6119.22 4551.88,6114.79 4554.66,6112.01 4564.85,6112.01 4567.63,6114.79 4567.63,6119.22 4570.41,6122.01 4580.59,6122.01 4583.38,6119.22 4583.38,6114.79 4586.16,6112.01 5322.01,6112.01 5486.97,5947.05 U5.31@5486.97,5804.14
SD_A7: U1.A5 U5.32 | length 1774.3
  Top Layer w3.94: U1.A5@4146.77,5863.23 4157,5863.23 4390.78,6097.01 4402.59,6097.01 4407.59,6102.01 4418.34,6102.01 4423.34,6097.01 4434.09,6097.01 4439.09,6102.01 4449.83,6102.01 4454.83,6097.01 4465.58,6097.01 4470.58,6102.01 4481.33,6102.01 4486.33,6097.01 4497.08,6097.01 4502.08,6102.01 4512.83,6102.01 4517.83,6097.01 4528.57,6097.01 4533.57,6102.01 4544.32,6102.01 4549.32,6097.01 4560.07,6097.01 4565.07,6102.01 4575.82,6102.01 4580.82,6097.01 4591.57,6097.01 4596.57,6102.01 4607.31,6102.01 4612.31,6097.01 4623.06,6097.01 4628.06,6102.01 4638.81,6102.01 4643.81,6097.01 4654.56,6097.01 4659.56,6102.01 4670.31,6102.01 4675.31,6097.01 4686.05,6097.01 4691.05,6102.01 4701.8,6102.01 4706.8,6097.01 4717.55,6097.01 4722.55,6102.01 4733.3,6102.01 4738.3,6097.01 4749.05,6097.01 4754.05,6102.01 4764.79,6102.01 4769.79,6097.01 4780.54,6097.01 4785.54,6102.01 4796.29,6102.01 4801.29,6097.01 4812.04,6097.01 4817.04,6102.01 4827.79,6102.01 4832.79,6097.01 4843.53,6097.01 4848.53,6102.01 4859.28,6102.01 4864.28,6097.01 4875.03,6097.01 4880.03,6102.01 4890.78,6102.01 4895.78,6097.01 4906.53,6097.01 4911.53,6102.01 4922.28,6102.01 4927.28,6097.01 4938.02,6097.01 4943.02,6102.01 4953.77,6102.01 4958.77,6097.01 4969.52,6097.01 4974.52,6102.01 4985.27,6102.01 4990.27,6097.01 5001.02,6097.01 5006.02,6102.01 5016.76,6102.01 5021.76,6097.01 5032.51,6097.01 5037.51,6102.01 5048.26,6102.01 5053.26,6097.01 5064.01,6097.01 5069.01,6102.01 5079.76,6102.01 5084.76,6097.01 5095.5,6097.01 5100.5,6102.01 5111.25,6102.01 5116.25,6097.01 5127,6097.01 5132,6102.01 5142.75,6102.01 5147.75,6097.01 5158.5,6097.01 5163.5,6102.01 5174.24,6102.01 5179.24,6097.01 5189.99,6097.01 5194.99,6102.01 5205.74,6102.01 5210.74,6097.01 5221.49,6097.01 5226.49,6102.01 5237.24,6102.01 5242.24,6097.01 5252.98,6097.01 5257.98,6102.01 5268.73,6102.01 5273.73,6097.01 5284.48,6097.01 5289.48,6102.01 5300.23,6102.01 5314.88,6087.35 5314.88,6080.3 5322.08,6073.11 5326.02,6073.11 5326.5,6073.58 5330.43,6073.58 5337.63,6066.39 5337.63,6062.45 5331.56,6056.38 5331.56,6052.44 5338.76,6045.24 5342.69,6045.24 5348.77,6051.31 5352.7,6051.31 5359.9,6044.11 5359.9,6040.18 5355.74,6036.02 5355.74,6032.08 5362.94,6024.88 5366.88,6024.88 5371.04,6029.04 5374.97,6029.04 5450.48,5953.54 5450.48,5809.14 U5.32@5455.48,5804.14
SD_A8: U1.A6 U5.33 | length 1748.8
  Top Layer w3.94: U1.A6@4178.27,5863.23 4397.05,6082.01 4408.86,6082.01 4411.64,6084.79 4411.64,6085.2 4414.43,6087.98 4424.61,6087.98 4427.39,6085.2 4427.39,6084.79 4430.17,6082.01 4440.35,6082.01 4443.14,6084.79 4443.14,6085.2 4445.92,6087.98 4456.1,6087.98 4458.89,6085.2 4458.89,6084.79 4461.67,6082.01 4471.85,6082.01 4474.63,6084.79 4474.63,6085.2 4477.42,6087.98 4487.6,6087.98 4490.38,6085.2 4490.38,6084.79 4493.17,6082.01 4503.35,6082.01 4506.13,6084.79 4506.13,6085.2 4508.91,6087.98 4519.1,6087.98 4521.88,6085.2 4521.88,6084.79 4524.66,6082.01 4534.84,6082.01 4537.63,6084.79 4537.63,6085.2 4540.41,6087.98 4550.59,6087.98 4553.38,6085.2 4553.38,6084.79 4556.16,6082.01 4566.34,6082.01 4569.12,6084.79 4569.12,6085.2 4571.91,6087.98 4582.09,6087.98 4584.87,6085.2 4584.87,6084.79 4587.65,6082.01 4597.84,6082.01 4600.62,6084.79 4600.62,6085.2 4603.4,6087.98 4613.58,6087.98 4616.37,6085.2 4616.37,6084.79 4619.15,6082.01 4629.33,6082.01 4632.12,6084.79 4632.12,6085.2 4634.9,6087.98 4645.08,6087.98 4647.86,6085.2 4647.86,6084.79 4650.65,6082.01 4660.83,6082.01 4663.61,6084.79 4663.61,6085.2 4666.4,6087.98 4676.58,6087.98 4679.36,6085.2 4679.36,6084.79 4682.14,6082.01 4692.32,6082.01 4695.11,6084.79 4695.11,6085.2 4697.89,6087.98 4708.07,6087.98 4710.86,6085.2 4710.86,6084.79 4713.64,6082.01 4723.82,6082.01 4726.6,6084.79 4726.6,6085.2 4729.39,6087.98 4739.57,6087.98 4742.35,6085.2 4742.35,6084.79 4745.14,6082.01 4755.32,6082.01 4758.1,6084.79 4758.1,6085.2 4760.88,6087.98 4771.06,6087.98 4773.85,6085.2 4773.85,6084.79 4776.63,6082.01 4786.81,6082.01 4789.6,6084.79 4789.6,6085.2 4792.38,6087.98 4802.56,6087.98 4805.34,6085.2 4805.34,6084.79 4808.13,6082.01 4818.31,6082.01 4821.09,6084.79 4821.09,6085.2 4823.88,6087.98 4834.06,6087.98 4836.84,6085.2 4836.84,6084.79 4839.62,6082.01 4849.8,6082.01 4852.59,6084.79 4852.59,6085.2 4855.37,6087.98 4865.55,6087.98 4868.34,6085.2 4868.34,6084.79 4871.12,6082.01 4881.3,6082.01 4884.08,6084.79 4884.08,6085.2 4886.87,6087.98 4897.05,6087.98 4899.83,6085.2 4899.83,6084.79 4902.62,6082.01 4912.8,6082.01 4915.58,6084.79 4915.58,6085.2 4918.36,6087.98 4928.54,6087.98 4931.33,6085.2 4931.33,6084.79 4934.11,6082.01 4944.29,6082.01 4947.08,6084.79 4947.08,6085.2 4949.86,6087.98 4960.04,6087.98 4962.82,6085.2 4962.82,6084.79 4965.61,6082.01 4975.79,6082.01 4978.57,6084.79 4978.57,6085.2 4981.36,6087.98 4991.54,6087.98 4994.32,6085.2 4994.32,6084.79 4997.1,6082.01 5007.28,6082.01 5010.07,6084.79 5010.07,6085.2 5012.85,6087.98 5023.03,6087.98 5025.82,6085.2 5025.82,6084.79 5028.6,6082.01 5038.78,6082.01 5041.56,6084.79 5041.56,6085.2 5044.35,6087.98 5054.53,6087.98 5057.31,6085.2 5057.31,6084.79 5060.1,6082.01 5070.28,6082.01 5073.06,6084.79 5073.06,6085.2 5075.84,6087.98 5086.02,6087.98 5088.81,6085.2 5088.81,6084.79 5091.59,6082.01 5101.77,6082.01 5104.56,6084.79 5104.56,6085.2 5107.34,6087.98 5117.52,6087.98 5120.3,6085.2 5120.3,6084.79 5123.09,6082.01 5133.27,6082.01 5136.05,6084.79 5136.05,6085.2 5138.84,6087.98 5149.02,6087.98 5151.8,6085.2 5151.8,6084.79 5154.58,6082.01 5164.76,6082.01 5167.55,6084.79 5167.55,6085.2 5170.33,6087.98 5180.51,6087.98 5183.3,6085.2 5183.3,6084.79 5186.08,6082.01 5196.26,6082.01 5199.04,6084.79 5199.04,6085.2 5201.83,6087.98 5212.01,6087.98 5214.79,6085.2 5214.79,6084.79 5217.58,6082.01 5227.76,6082.01 5230.54,6084.79 5230.54,6085.2 5233.32,6087.98 5243.5,6087.98 5246.29,6085.2 5246.29,6084.79 5249.07,6082.01 5259.25,6082.01 5262.04,6084.79 5262.04,6085.2 5264.82,6087.98 5275,6087.98 5277.78,6085.2 5277.78,6084.79 5280.57,6082.01 5292.01,6082.01 5300.36,6073.66 5300.36,6069.72 5299.88,6069.24 5299.88,6065.3 5307.08,6058.11 5311.02,6058.11 5311.5,6058.58 5315.43,6058.58 5322.63,6051.39 5322.63,6047.45 5320.45,6045.27 5320.45,6041.33 5327.65,6034.13 5331.59,6034.13 5333.77,6036.31 5337.7,6036.31 5344.9,6029.11 5344.9,6025.18 5342.72,6023 5342.72,6019.06 5349.92,6011.86 5353.86,6011.86 5356.04,6014.04 5359.97,6014.04 5367.17,6006.84 5367.17,6002.91 5364.99,6000.73 5364.99,5996.79 5372.19,5989.59 5376.13,5989.59 5378.31,5991.77 5382.25,5991.77 5389.44,5984.57 5389.44,5980.63 5387.61,5978.8 5387.61,5974.86 5394.81,5967.67 5398.75,5967.67 5400.58,5969.5 5404.52,5969.5 5423.98,5950.04 5423.98,5938.23 5421.19,5935.44 5420.52,5935.44 5417.73,5932.66 5417.73,5922.48 5420.52,5919.69 5421.19,5919.69 5423.98,5916.91 5423.98,5905.1 5421.19,5902.32 5420.52,5902.32 5417.73,5899.53 5417.73,5889.35 5420.52,5886.57 5421.19,5886.57 5423.98,5883.78 U5.33@5423.98,5804.14
SD_A9: U1.A7 U5.34 | length 1787.7
  Top Layer w3.94: U1.A7@4209.77,5863.23 4413.55,6067.01 4425.36,6067.01 4428.14,6069.79 4428.14,6070.2 4430.93,6072.98 4441.11,6072.98 4443.89,6070.2 4443.89,6069.79 4446.67,6067.01 4456.85,6067.01 4459.64,6069.79 4459.64,6070.2 4462.42,6072.98 4472.6,6072.98 4475.39,6070.2 4475.39,6069.79 4478.17,6067.01 4488.35,6067.01 4491.13,6069.79 4491.13,6070.2 4493.92,6072.98 4504.1,6072.98 4506.88,6070.2 4506.88,6069.79 4509.67,6067.01 4519.85,6067.01 4522.63,6069.79 4522.63,6070.2 4525.41,6072.98 4535.6,6072.98 4538.38,6070.2 4538.38,6069.79 4541.16,6067.01 4551.34,6067.01 4554.13,6069.79 4554.13,6070.2 4556.91,6072.98 4567.09,6072.98 4569.88,6070.2 4569.88,6069.79 4572.66,6067.01 4582.84,6067.01 4585.62,6069.79 4585.62,6070.2 4588.41,6072.98 4598.59,6072.98 4601.37,6070.2 4601.37,6069.79 4604.15,6067.01 4614.34,6067.01 4617.12,6069.79 4617.12,6070.2 4619.9,6072.98 4630.08,6072.98 4632.87,6070.2 4632.87,6069.79 4635.65,6067.01 4645.83,6067.01 4648.62,6069.79 4648.62,6070.2 4651.4,6072.98 4661.58,6072.98 4664.36,6070.2 4664.36,6069.79 4667.15,6067.01 4677.33,6067.01 4680.11,6069.79 4680.11,6070.2 4682.9,6072.98 4693.08,6072.98 4695.86,6070.2 4695.86,6069.79 4698.64,6067.01 4708.82,6067.01 4711.61,6069.79 4711.61,6070.2 4714.39,6072.98 4724.57,6072.98 4727.36,6070.2 4727.36,6069.79 4730.14,6067.01 4740.32,6067.01 4743.1,6069.79 4743.1,6070.2 4745.89,6072.98 4756.07,6072.98 4758.85,6070.2 4758.85,6069.79 4761.64,6067.01 4771.82,6067.01 4774.6,6069.79 4774.6,6070.2 4777.38,6072.98 4787.56,6072.98 4790.35,6070.2 4790.35,6069.79 4793.13,6067.01 4803.31,6067.01 4806.1,6069.79 4806.1,6070.2 4808.88,6072.98 4819.06,6072.98 4821.84,6070.2 4821.84,6069.79 4824.63,6067.01 4834.81,6067.01 4837.59,6069.79 4837.59,6070.2 4840.38,6072.98 4850.56,6072.98 4853.34,6070.2 4853.34,6069.79 4856.12,6067.01 4866.3,6067.01 4869.09,6069.79 4869.09,6070.2 4871.87,6072.98 4882.05,6072.98 4884.84,6070.2 4884.84,6069.79 4887.62,6067.01 4897.8,6067.01 4900.58,6069.79 4900.58,6070.2 4903.37,6072.98 4913.55,6072.98 4916.33,6070.2 4916.33,6069.79 4919.12,6067.01 4929.3,6067.01 4932.08,6069.79 4932.08,6070.2 4934.86,6072.98 4945.04,6072.98 4947.83,6070.2 4947.83,6069.79 4950.61,6067.01 4960.79,6067.01 4963.58,6069.79 4963.58,6070.2 4966.36,6072.98 4976.54,6072.98 4979.32,6070.2 4979.32,6069.79 4982.11,6067.01 4992.29,6067.01 4995.07,6069.79 4995.07,6070.2 4997.86,6072.98 5008.04,6072.98 5010.82,6070.2 5010.82,6069.79 5013.6,6067.01 5023.78,6067.01 5026.57,6069.79 5026.57,6070.2 5029.35,6072.98 5039.53,6072.98 5042.32,6070.2 5042.32,6069.79 5045.1,6067.01 5055.28,6067.01 5058.06,6069.79 5058.06,6070.2 5060.85,6072.98 5071.03,6072.98 5073.81,6070.2 5073.81,6069.79 5076.6,6067.01 5086.78,6067.01 5089.56,6069.79 5089.56,6070.2 5092.34,6072.98 5102.52,6072.98 5105.31,6070.2 5105.31,6069.79 5108.09,6067.01 5118.27,6067.01 5121.06,6069.79 5121.06,6070.2 5123.84,6072.98 5134.02,6072.98 5136.8,6070.2 5136.8,6069.79 5139.59,6067.01 5149.77,6067.01 5152.55,6069.79 5152.55,6070.2 5155.34,6072.98 5165.52,6072.98 5168.3,6070.2 5168.3,6069.79 5171.08,6067.01 5181.26,6067.01 5184.05,6069.79 5184.05,6070.2 5186.83,6072.98 5197.01,6072.98 5199.8,6070.2 5199.8,6069.79 5202.58,6067.01 5212.76,6067.01 5215.54,6069.79 5215.54,6070.2 5218.33,6072.98 5228.51,6072.98 5231.29,6070.2 5231.29,6069.79 5234.08,6067.01 5244.26,6067.01 5247.04,6069.79 5247.04,6070.2 5249.82,6072.98 5260,6072.98 5262.79,6070.2 5262.79,6069.79 5265.57,6067.01 5282.01,6067.01 5290.36,6058.66 5290.36,6054.72 5289.88,6054.24 5289.88,6050.3 5297.08,6043.11 5301.02,6043.11 5301.5,6043.58 5305.43,6043.58 5312.63,6036.39 5312.63,6032.45 5310.45,6030.27 5310.45,6026.33 5317.65,6019.13 5321.59,6019.13 5323.77,6021.31 5327.7,6021.31 5334.9,6014.11 5334.9,6010.18 5332.72,6008 5332.72,6004.06 5339.92,5996.86 5343.86,5996.86 5346.04,5999.04 5349.97,5999.04 5357.17,5991.84 5357.17,5987.91 5354.99,5985.73 5354.99,5981.79 5362.19,5974.59 5366.13,5974.59 5368.31,5976.77 5372.25,5976.77 5392.48,5956.54 5392.48,5956.22 5389.69,5953.44 5374.79,5953.44 5372.01,5950.65 5372.01,5940.47 5374.79,5937.69 5389.69,5937.69 5392.48,5934.9 5392.48,5924.72 5389.69,5921.94 5374.79,5921.94 5372.01,5919.16 5372.01,5908.98 5374.79,5906.19 5389.69,5906.19 5392.48,5903.41 5392.48,5893.23 5389.69,5890.44 5374.79,5890.44 5372.01,5887.66 5372.01,5877.48 5374.79,5874.7 5389.69,5874.7 5392.48,5871.91 5392.48,5861.73 5389.69,5858.95 5374.79,5858.95 5372.01,5856.16 5372.01,5845.98 5374.79,5843.2 5389.69,5843.2 5392.48,5840.42 U5.34@5392.48,5804.14
SD_A10: U1.T7 U5.22 | length 1774.7
  Top Layer w3.94: U1.T7@4209.77,5390.79 4438.55,5162.01 4625.97,5162.01 4628.75,5159.22 4628.75,5154.79 4631.54,5152.01 4641.72,5152.01 4644.5,5154.79 4644.5,5159.22 4647.28,5162.01 4657.46,5162.01 4660.25,5159.22 4660.25,5154.79 4663.03,5152.01 4673.21,5152.01 4676,5154.79 4676,5159.22 4678.78,5162.01 4688.96,5162.01 4691.74,5159.22 4691.74,5154.79 4694.53,5152.01 4704.71,5152.01 4707.49,5154.79 4707.49,5159.22 4710.28,5162.01 4720.46,5162.01 4723.24,5159.22 4723.24,5154.79 4726.02,5152.01 4736.2,5152.01 4738.99,5154.79 4738.99,5159.22 4741.77,5162.01 4751.95,5162.01 4754.74,5159.22 4754.74,5154.79 4757.52,5152.01 4767.7,5152.01 4770.48,5154.79 4770.48,5159.22 4773.27,5162.01 4783.45,5162.01 4786.23,5159.22 4786.23,5154.79 4789.02,5152.01 4799.2,5152.01 4801.98,5154.79 4801.98,5159.22 4804.76,5162.01 4814.94,5162.01 4817.73,5159.22 4817.73,5154.79 4820.51,5152.01 4830.69,5152.01 4833.48,5154.79 4833.48,5159.22 4836.26,5162.01 4846.44,5162.01 4849.22,5159.22 4849.22,5154.79 4852.01,5152.01 4862.19,5152.01 4864.97,5154.79 4864.97,5159.22 4867.76,5162.01 4877.94,5162.01 4880.72,5159.22 4880.72,5154.79 4883.5,5152.01 4893.68,5152.01 4896.47,5154.79 4896.47,5159.22 4899.25,5162.01 4909.43,5162.01 4912.22,5159.22 4912.22,5154.79 4915,5152.01 4925.18,5152.01 4927.96,5154.79 4927.96,5159.22 4930.75,5162.01 4940.93,5162.01 4943.71,5159.22 4943.71,5154.79 4946.5,5152.01 4956.68,5152.01 4959.46,5154.79 4959.46,5159.22 4962.24,5162.01 4972.42,5162.01 4975.21,5159.22 4975.21,5154.79 4977.99,5152.01 4988.17,5152.01 4990.96,5154.79 4990.96,5159.22 4993.74,5162.01 5003.92,5162.01 5006.7,5159.22 5006.7,5154.79 5009.49,5152.01 5019.67,5152.01 5022.45,5154.79 5022.45,5159.22 5025.24,5162.01 5035.42,5162.01 5038.2,5159.22 5038.2,5154.79 5040.98,5152.01 5051.16,5152.01 5053.95,5154.79 5053.95,5159.22 5056.73,5162.01 5066.91,5162.01 5069.7,5159.22 5069.7,5154.79 5072.48,5152.01 5082.66,5152.01 5085.44,5154.79 5085.44,5159.22 5088.23,5162.01 5098.41,5162.01 5101.19,5159.22 5101.19,5154.79 5103.98,5152.01 5114.16,5152.01 5116.94,5154.79 5116.94,5159.22 5119.72,5162.01 5129.9,5162.01 5132.69,5159.22 5132.69,5154.79 5135.47,5152.01 5145.65,5152.01 5148.44,5154.79 5148.44,5159.22 5151.22,5162.01 5161.4,5162.01 5164.18,5159.22 5164.18,5154.79 5166.97,5152.01 5177.15,5152.01 5179.93,5154.79 5179.93,5159.22 5182.72,5162.01 5192.9,5162.01 5195.68,5159.22 5195.68,5154.79 5198.46,5152.01 5208.64,5152.01 5211.43,5154.79 5211.43,5159.22 5214.21,5162.01 5224.39,5162.01 5227.18,5159.22 5227.18,5154.79 5229.96,5152.01 5240.14,5152.01 5242.92,5154.79 5242.92,5159.22 5245.71,5162.01 5255.89,5162.01 5258.67,5159.22 5258.67,5154.79 5261.46,5152.01 5271.64,5152.01 5274.42,5154.79 5274.42,5159.22 5277.2,5162.01 5287.39,5162.01 5290.17,5159.22 5290.17,5154.79 5292.95,5152.01 5303.13,5152.01 5305.92,5154.79 5305.92,5159.22 5308.7,5162.01 5318.88,5162.01 5321.66,5159.22 5321.66,5154.79 5324.45,5152.01 5334.63,5152.01 5337.41,5154.79 5337.41,5159.22 5340.2,5162.01 5352.01,5162.01 5423.98,5233.98 U5.22@5423.98,5359.88
SD_A11: U1.A8 U5.35 | length 1739.9
  Top Layer w3.94: U1.A8@4241.26,5863.23 4425.04,6047.01 4436.85,6047.01 4439.63,6049.79 4439.63,6054.22 4442.42,6057.01 4452.6,6057.01 4455.38,6054.22 4455.38,6049.79 4458.16,6047.01 4468.35,6047.01 4471.13,6049.79 4471.13,6054.22 4473.91,6057.01 4484.09,6057.01 4486.88,6054.22 4486.88,6049.79 4489.66,6047.01 4499.84,6047.01 4502.62,6049.79 4502.62,6054.22 4505.41,6057.01 4515.59,6057.01 4518.37,6054.22 4518.37,6049.79 4521.16,6047.01 4531.34,6047.01 4534.12,6049.79 4534.12,6054.22 4536.9,6057.01 4547.09,6057.01 4549.87,6054.22 4549.87,6049.79 4552.65,6047.01 4562.83,6047.01 4565.62,6049.79 4565.62,6054.22 4568.4,6057.01 4578.58,6057.01 4581.37,6054.22 4581.37,6049.79 4584.15,6047.01 4594.33,6047.01 4597.11,6049.79 4597.11,6054.22 4599.9,6057.01 4610.08,6057.01 4612.86,6054.22 4612.86,6049.79 4615.65,6047.01 4625.83,6047.01 4628.61,6049.79 4628.61,6054.22 4631.39,6057.01 4641.57,6057.01 4644.36,6054.22 4644.36,6049.79 4647.14,6047.01 4657.32,6047.01 4660.11,6049.79 4660.11,6054.22 4662.89,6057.01 4673.07,6057.01 4675.85,6054.22 4675.85,6049.79 4678.64,6047.01 4688.82,6047.01 4691.6,6049.79 4691.6,6054.22 4694.39,6057.01 4704.57,6057.01 4707.35,6054.22 4707.35,6049.79 4710.13,6047.01 4720.31,6047.01 4723.1,6049.79 4723.1,6054.22 4725.88,6057.01 4736.06,6057.01 4738.85,6054.22 4738.85,6049.79 4741.63,6047.01 4751.81,6047.01 4754.59,6049.79 4754.59,6054.22 4757.38,6057.01 4767.56,6057.01 4770.34,6054.22 4770.34,6049.79 4773.13,6047.01 4783.31,6047.01 4786.09,6049.79 4786.09,6054.22 4788.87,6057.01 4799.05,6057.01 4801.84,6054.22 4801.84,6049.79 4804.62,6047.01 4814.8,6047.01 4817.59,6049.79 4817.59,6054.22 4820.37,6057.01 4830.55,6057.01 4833.33,6054.22 4833.33,6049.79 4836.12,6047.01 4846.3,6047.01 4849.08,6049.79 4849.08,6054.22 4851.87,6057.01 4862.05,6057.01 4864.83,6054.22 4864.83,6049.79 4867.61,6047.01 4877.79,6047.01 4880.58,6049.79 4880.58,6054.22 4883.36,6057.01 4893.54,6057.01 4896.33,6054.22 4896.33,6049.79 4899.11,6047.01 4909.29,6047.01 4912.07,6049.79 4912.07,6054.22 4914.86,6057.01 4925.04,6057.01 4927.82,6054.22 4927.82,6049.79 4930.61,6047.01 4940.79,6047.01 4943.57,6049.79 4943.57,6054.22 4946.35,6057.01 4956.53,6057.01 4959.32,6054.22 4959.32,6049.79 4962.1,6047.01 4972.28,6047.01 4975.07,6049.79 4975.07,6054.22 4977.85,6057.01 4988.03,6057.01 4990.81,6054.22 4990.81,6049.79 4993.6,6047.01 5003.78,6047.01 5006.56,6049.79 5006.56,6054.22 5009.35,6057.01 5019.53,6057.01 5022.31,6054.22 5022.31,6049.79 5025.09,6047.01 5035.27,6047.01 5038.06,6049.79 5038.06,6054.22 5040.84,6057.01 5051.02,6057.01 5053.81,6054.22 5053.81,6049.79 5056.59,6047.01 5066.77,6047.01 5069.55,6049.79 5069.55,6054.22 5072.34,6057.01 5082.52,6057.01 5085.3,6054.22 5085.3,6049.79 5088.09,6047.01 5098.27,6047.01 5101.05,6049.79 5101.05,6054.22 5103.83,6057.01 5114.01,6057.01 5116.8,6054.22 5116.8,6049.79 5119.58,6047.01 5129.76,6047.01 5132.55,6049.79 5132.55,6054.22 5135.33,6057.01 5145.51,6057.01 5148.29,6054.22 5148.29,6049.79 5151.08,6047.01 5161.26,6047.01 5164.04,6049.79 5164.04,6054.22 5166.83,6057.01 5177.01,6057.01 5179.79,6054.22 5179.79,6049.79 5182.57,6047.01 5192.75,6047.01 5195.54,6049.79 5195.54,6054.22 5198.32,6057.01 5208.5,6057.01 5211.29,6054.22 5211.29,6049.79 5214.07,6047.01 5224.25,6047.01 5227.03,6049.79 5227.03,6054.22 5229.82,6057.01 5240,6057.01 5242.78,6054.22 5242.78,6049.79 5245.57,6047.01 5277.01,6047.01 5360.99,5963.03 U5.35@5360.99,5804.14